# Altium PCB SSD1306_PCB.PcbDoc
Units mm, origin at the board's own origin, x right, y up, seen from the top; angles counter-clockwise.
Board outline 40.8 x 26 mm, 2 copper layers (Top Layer, Bottom Layer), stack 1.571 mm thick; 5 components, 5 nets, 17 pads, 0 vias.
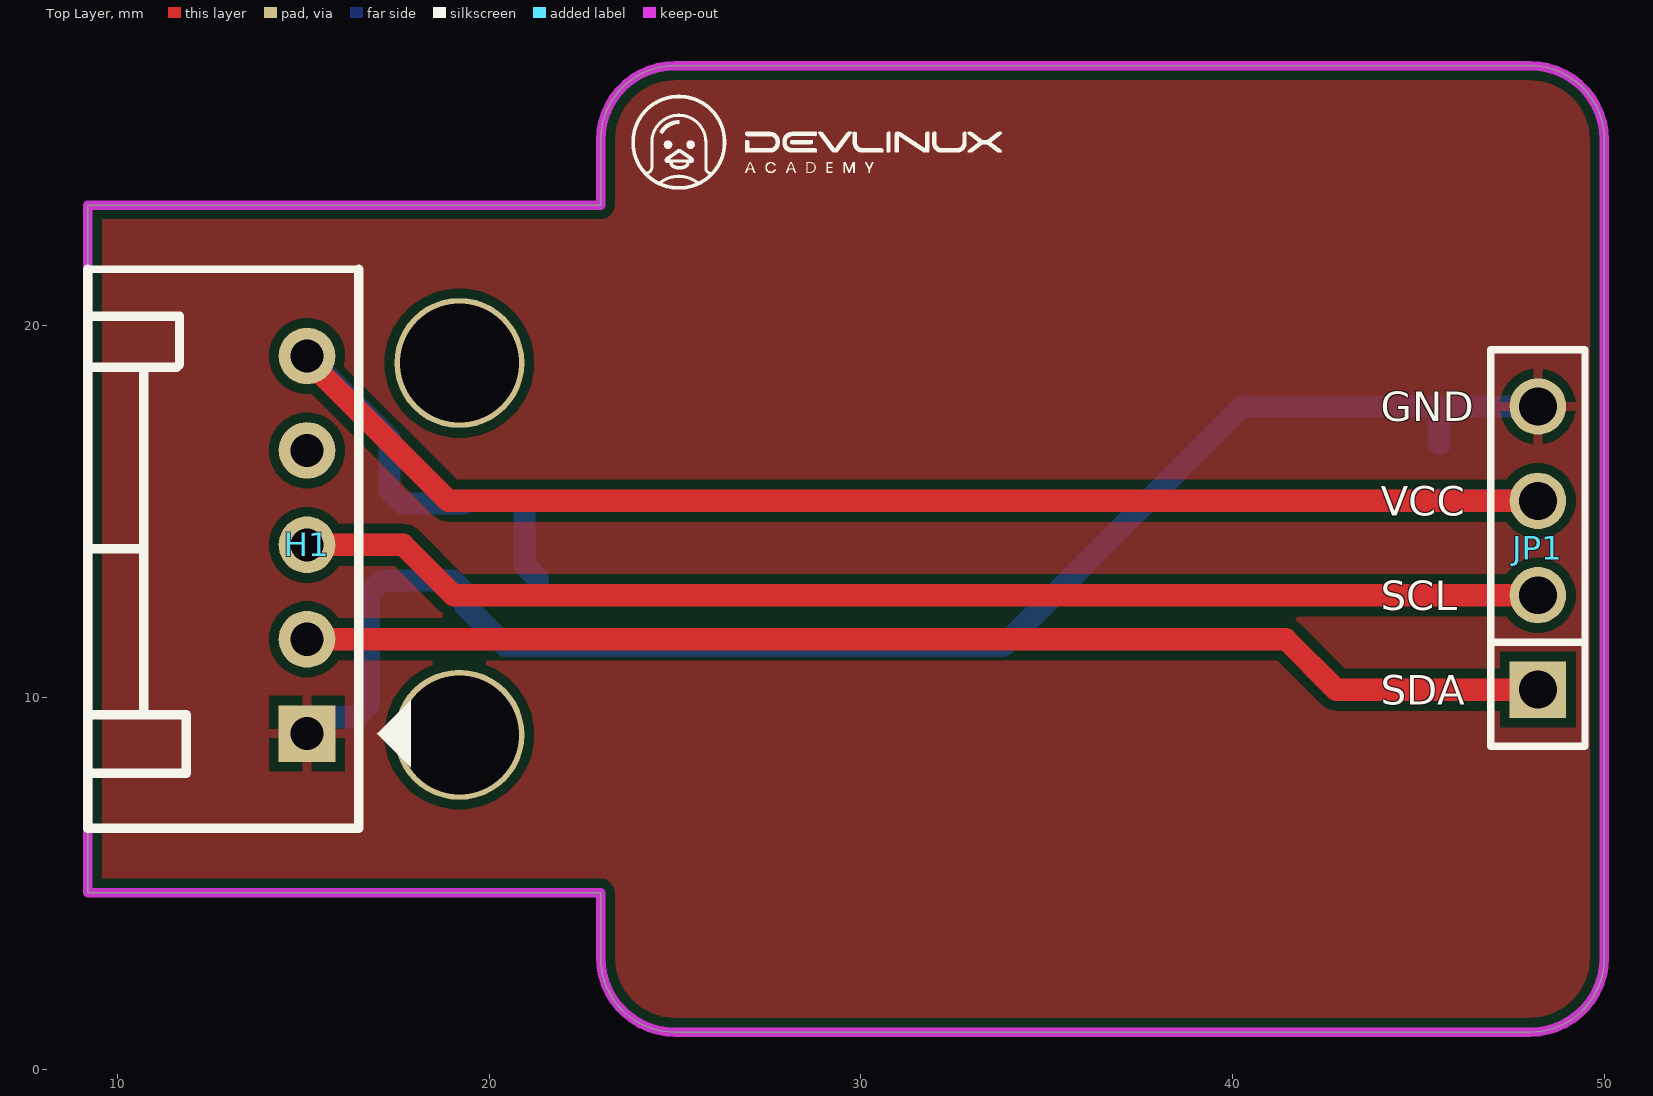
[diagram p0: Top Layer view]
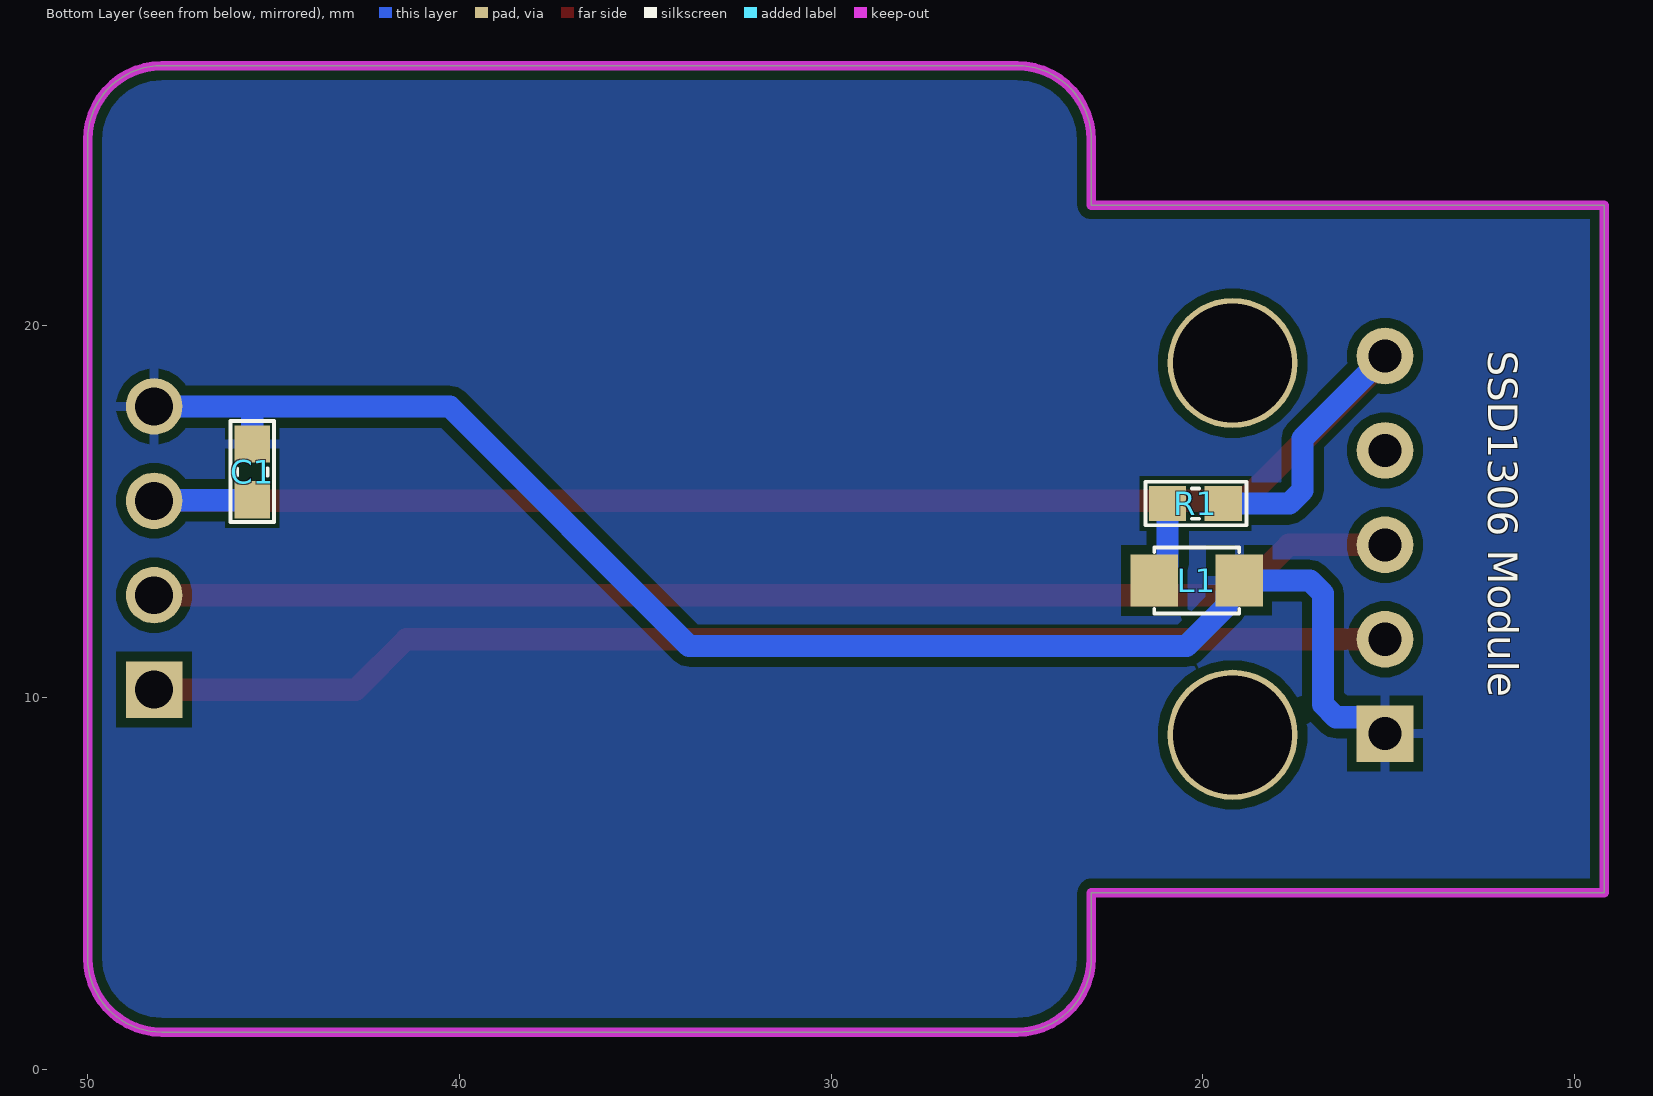
[diagram p1: Bottom Layer view, seen from below]
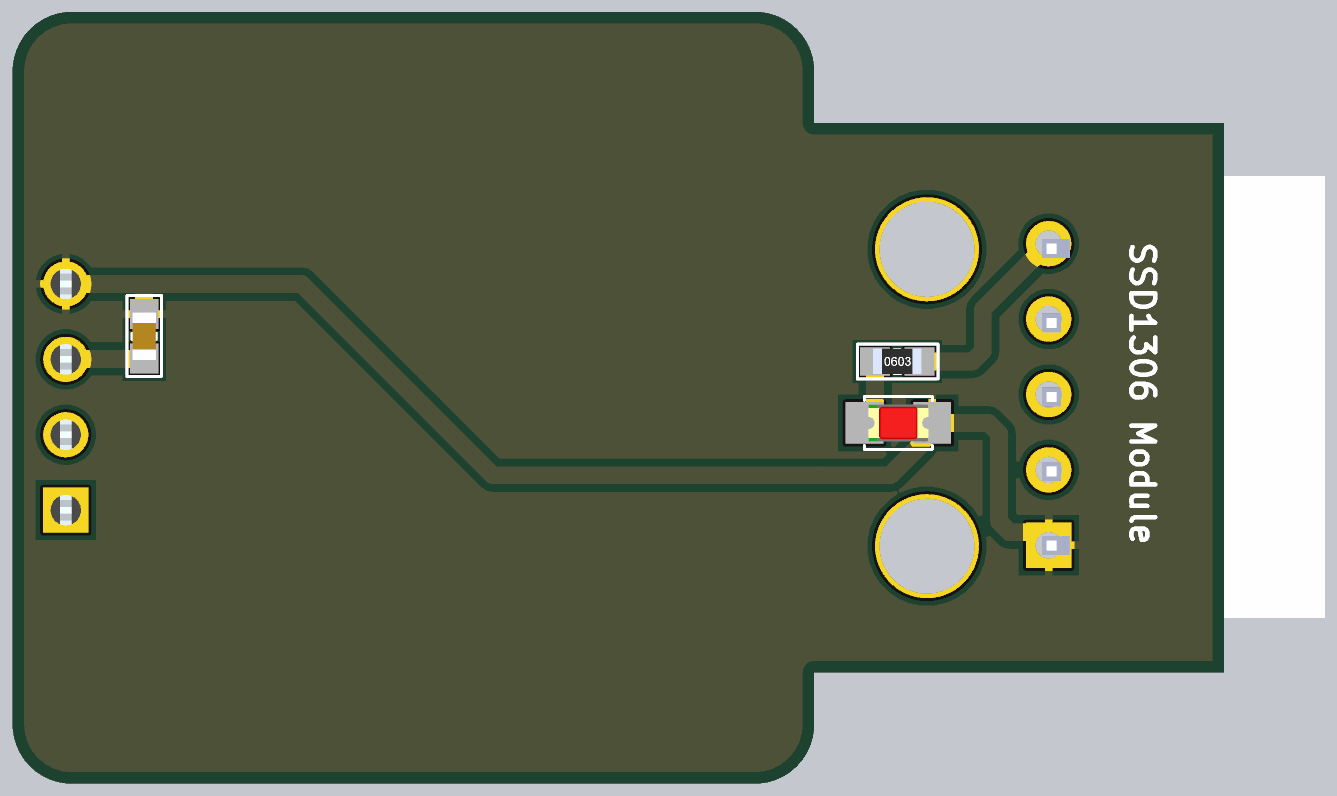
[diagram p2: 3D render of the assembled board from below, using the file's embedded part models]

## Layer stack, top to bottom
Top Solder: solder mask 0.0102, Solder Resist, Dk 3.5
Top Layer: signal copper 0.0356
Dielectric 1: dielectric 1.5, FR-4, Dk 4.8
Bottom Layer: signal copper 0.0356
Bottom Solder: solder mask 0.0102, Solder Resist, Dk 3.5

## Board outline
9.2,4.75 9.2,23.25 23,23.25 23,25 cw(c25,25) 25,27 48,27 cw(c48,25) 50,25 50,3 cw(c48,3) 48,1 25,1 cw(c25,3) 23,3 23,4.75

## Design rules (kind name [scope] priority, off if disabled: settings)
Clearance [All] p1: gap=0.254 ignorepadtopadclearanceinfootprint=FALSE except(0: Arc-Hole Track-Hole SMDPad-Hole THPad-Hole Via-Hole Fill-Hole Poly-Hole Region-Hole Text-Hole)
PolygonConnect [All] p1: connectstyle=Relief reliefconductorwidth=0.254 reliefentries=4 polygonreliefangle="90 Angle" airgapwidth=0.254
RoomDefinition SSD1306_SCH [InComponentClass('SSD1306_SCH')] p1: confinementstyle=ConfineIn formatcopy=TRUE lockcomponents=FALSE outline 178.943,26.797 207.391,26.797 207.391,46.101 178.943,46.101
RoutingVias [All] p1: holewidth=0.711 width=1.27 viastyle="Through Hole" minholewidth=0.711 minwidth=1.27 maxholewidth=0.711 maxwidth=1.27
SolderMaskExpansion [All] p1: expansion=0.102 istentingtop=FALSE
Width NET [All] p1: maxlimit=0.6 minlimit=0.4 preferedwidth=0.5
30 further rules are at their usual default settings.

## Components (designator, comment, footprint, x,y, rotation, side; value= is the part's Value field where it differs from the comment)
C1 "100nF" "tu 0603" 45.57,16.07 r90 bottom
H1 "Header 5P 2.54 Duc Cong" "Header 5P DC 2.54" 15.1,9.03 r180 top
JP1 "SSD1306" "JP 1x4 CT" 48.21,10.214 r90 top
L1 "LED RED" LED-0805-Red 21.306,13.15 r180 bottom
R1 "1k" "tro smd 0603" 20.2,15.22 r180 bottom

## Footprints (in the part's own frame and the unit in brackets; to place one, negate y for a bottom-side part, rotate by r counter-clockwise, add the part's x,y. Pads: shape width x height; smd on the part's side, far side on the other; paste and mask are expansions set on the pad)
"Header 5P DC 2.54" [mil]
  rect 60x60 hole 35: 1(0,0)
  round 60 hole 35: 2(0,-100) 3(0,-200) 4(0,-300) 5(0,-400)
  silkscreen extent -110,-492 232,100, body extent -87,-490 366,97, height 240
"JP 1x4 CT" [mm]
  rect 1.52x1.52 hole 1.02: 1(0,0)
  round 1.52 hole 1.02: 2(2.54,0) 3(5.08,0) 4(7.62,0)
  silkscreen extent -1.52,-1.27 9.14,1.27, body extent -1.52,-1.25 9.14,1.25, height 8.51
LED-0805-Red [mil]
  rect 50x55 smd: 1(0,0) 2(90,0)
  silkscreen extent 0,-35 90,35, body extent 5,-25 85,25, height 43
"tro smd 0603" [mm] "Chip Capacitor, 2-Leads, Body 1,60x0,80mm, IPC Medium Density"
  rect 1x0.95 smd mask+0.076: 1(-0.75,0) 2(0.75,0)
  silkscreen extent -1.35,-0.58 1.37,0.58, body extent -0.82,-0.42 0.82,0.43, height 0.44
"tu 0603" [mm] "Chip Capacitor, 2-Leads, Body 1,60x0,80mm, IPC Medium Density"
  rect 1x0.95 smd mask+0.076: 1(-0.75,0) 2(0.75,0)
  silkscreen extent -1.35,-0.58 1.37,0.58, body extent -0.8,-0.4 0.8,0.4, height 0.9

## Part data
C1: library part "Tu 0603 104 50V 10%", "Dán", Chung_Loai=Dán, Don_Vi=Con, Ma_Hang=MH004568, So_Chan=2, Ten_Linh_Kien="Tụ 0603 104-100nF 10% 50V"
H1: "Cắm", Chung_Loai=Cắm, Don_Vi=Con, Ma_Hang=MH001308, Ten_Linh_Kien="Header 5P XH2.54-5P Đực Cong"
JP1: library part "JP 1x4 2.54 Cai Thang", "Cắm", Chung_Loai=Cắm, Don_Vi=Con, Ma_Hang=MH004006, Ten_Linh_Kien="Jump Đơn Cái 2.54MM 1x20P Thẳng"
L1: library part "LED 0805 Do", "Dán", Chung_Loai=Dán, Don_Vi=Con, Ma_Hang=MH000897, Ten_Linh_Kien="LED 0805 Màu Đỏ (Red)"
R1: library part "Tro 0603 1% 1k", "Dán", Chung_Loai=Dán, Don_Vi=Con, Ma_Hang=MH006334, So_Chan=2, Ten_Linh_Kien="Trở 0603 1% 1k"

## Free pads (board coordinates)
  round 3.5 hole 3.2: 12(19.2,9) 12(19.2,19)

## Nets (pads, with @x,y where several pads share a name; then routed paths per layer and width w, separated by ;. In a path a pad name is that pad's centre, name@x,y a point inside that pad or via, vN(x,y) a via of type N, cw(c..) or ccw(c..) an arc to the next point about the centre after c; other vN are vias at no path point)
+5: C1.1 H1.5 JP1.3 R1.2 | length 44.1
  Top Layer w0.6: H1.5 15.1,19.1 18.906,15.294 JP1.3
  Bottom Layer w0.6: H1.5 17.32,16.97 17.32,15.571 17.671,15.22 19.3,15.22 R1.2@19.32,15.24 ; C1.1 45.583,15.307 48.197,15.307 JP1.3
GND: C1.2 H1.1 JP1.4 L1.2 | length 41.2
  Bottom Layer w0.6: H1.1 15.54,9.47 16.419,9.47 16.77,9.821 16.77,12.799 17.121,13.15 L1.2 19.355,12.815 19.355,12.475 20.44,11.39 33.82,11.39 40.26,17.83 45.57,17.83 ; C1.2 45.57,17.83 ; JP1.4 48.206,17.83 45.57,17.83
I2C1_SCL: H1.3 JP1.2 | length 33.7
  Top Layer w0.6: H1.3 17.69,14.11 19.046,12.754 JP1.2
I2C1_SDA: H1.2 JP1.1 | length 33.7
  Top Layer w0.6: H1.2 41.43,11.57 42.786,10.214 JP1.1
NetL1_1: L1.1 R1.1 | length 2.2
  Bottom Layer w0.6: R1.1 20.95,13.569 21.306,13.213 L1.1
pads on no net: H1.4

## Polygon pours and split planes (outlines as drawn)
GND on Top Layer "GND_L01_P000" (solid, pour order 0): 9.2,23.25 23,23.25 23,27 50,27 50,1 23,1 23,4.75 9.2,4.75
GND on Bottom Layer "GND_L02_P001" (solid, pour order 1): 9.2,23.25 23,23.25 23,27 50,27 50,1 23,1 23,4.75 9.2,4.75

## Keep-outs
Keep-Out Layer:
  lines w0.254: 9.2,4.75 9.2,14 9.2,23.25 23,23.25 23,25 cw(c25,25) 25,27 48,27 cw(c48,25) 50,25 50,3 cw(c48,3) 48,1 25,1 cw(c25,3) 23,3 23,4.75 9.2,4.75

## Silkscreen, mask and mechanical layers (free items; w line width, h text height)
Top Overlay:
  drawing of 21 lines, arcs and shapes, not listed
  text "GND" at 43.99,17.43 h0.8
  text "VCC" at 43.99,14.89 h0.8
  text "SCL" at 43.99,12.35 h0.8
  text "SDA" at 43.99,9.81 h0.8
Bottom Overlay:
  text "SSD1306 Module" at 12.32,19.33 h0.8 r90